# Altium PCB Ballast and Depth Controller.PcbDoc
Units mil, origin at the board's own origin, x right, y up, seen from the top; angles counter-clockwise.
Board outline 5430 x 3065 mil, 4 copper layers (Top Layer, Ground Plane, Power Plane, Bottom Layer); 103 components, 75 nets, 373 pads, 301 vias.
Unrouted connection lines stored in the file: 2.
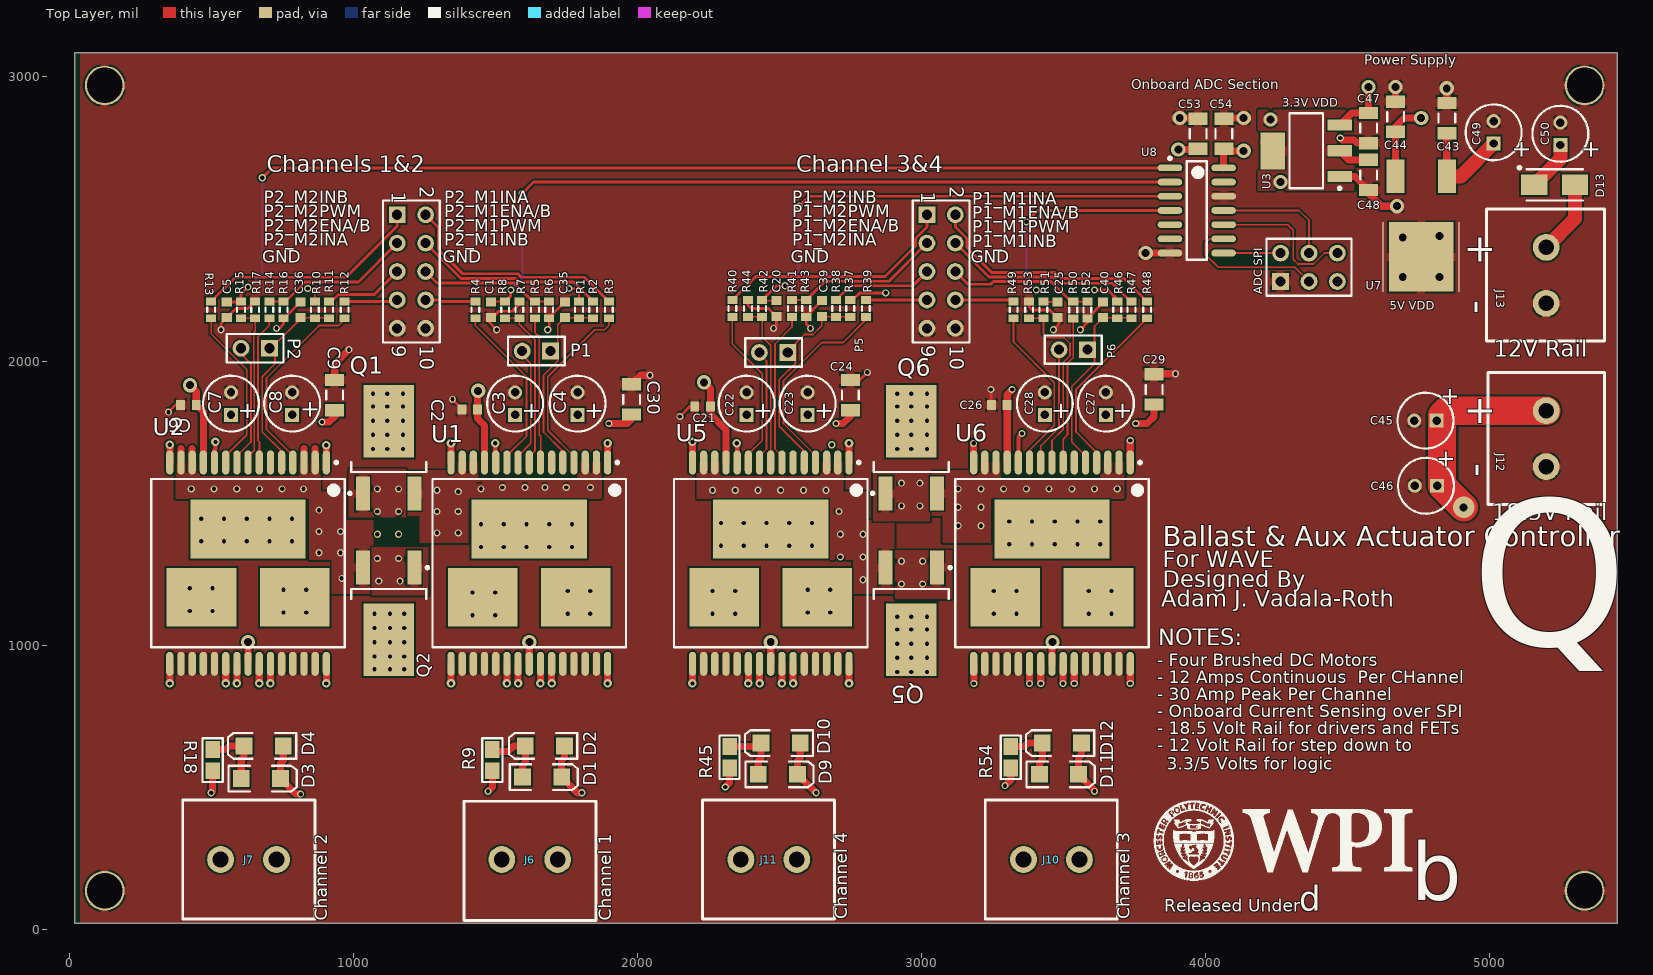
[diagram p0: Top Layer view]
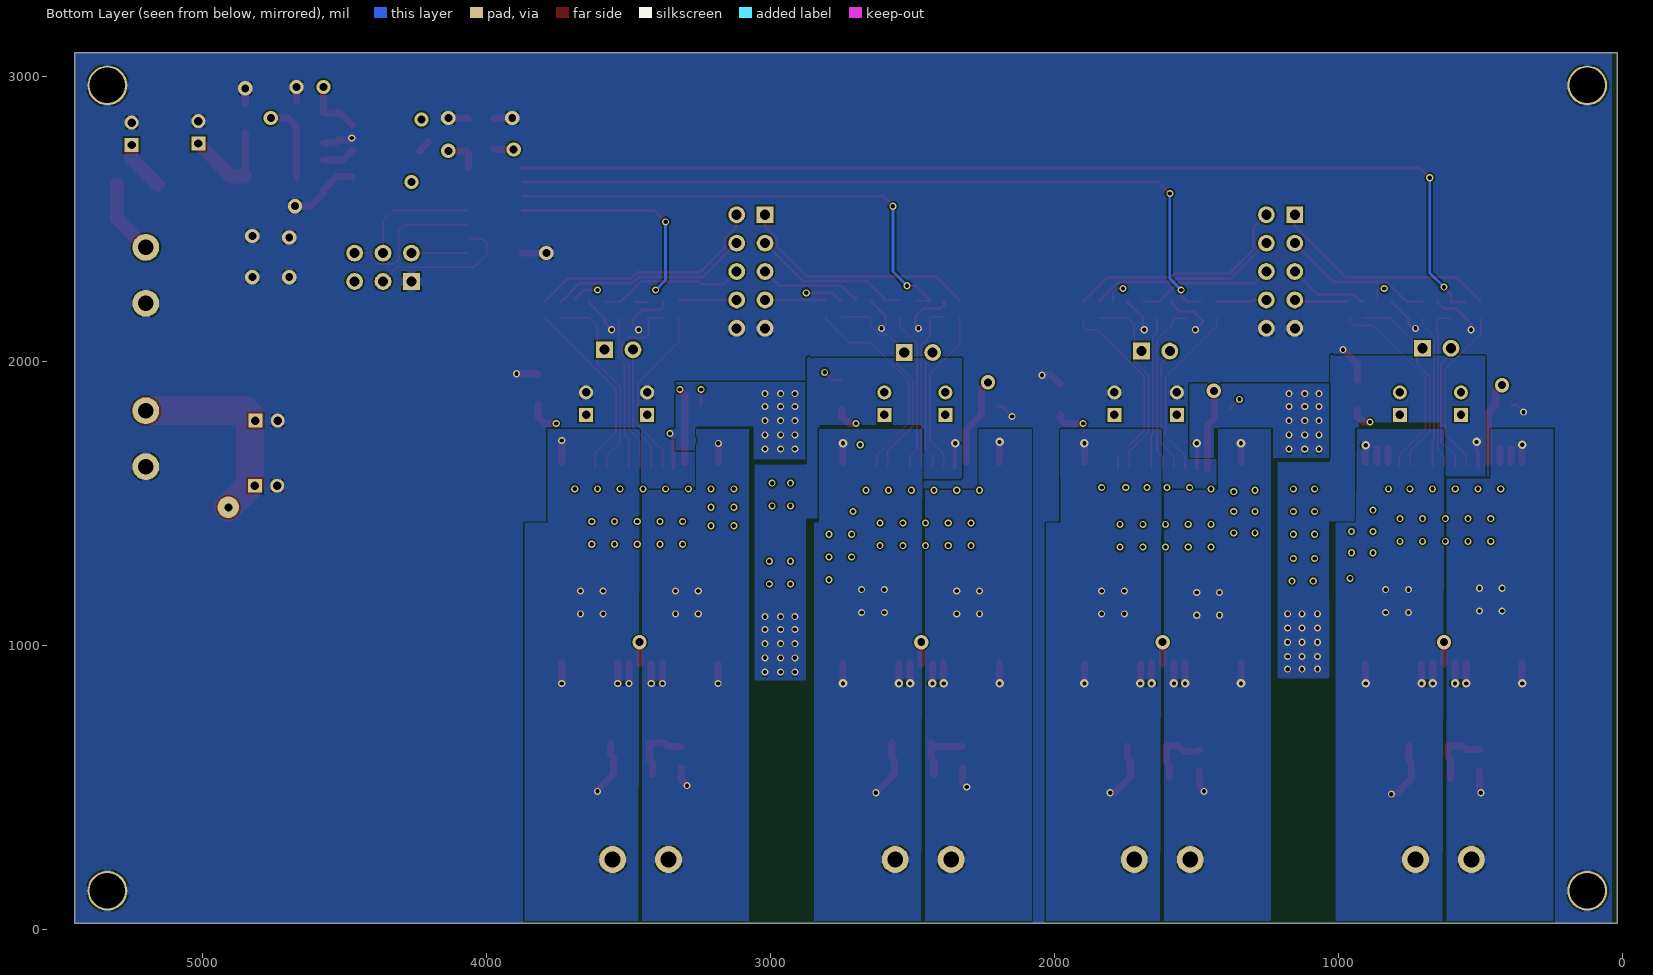
[diagram p1: Bottom Layer view, seen from below]
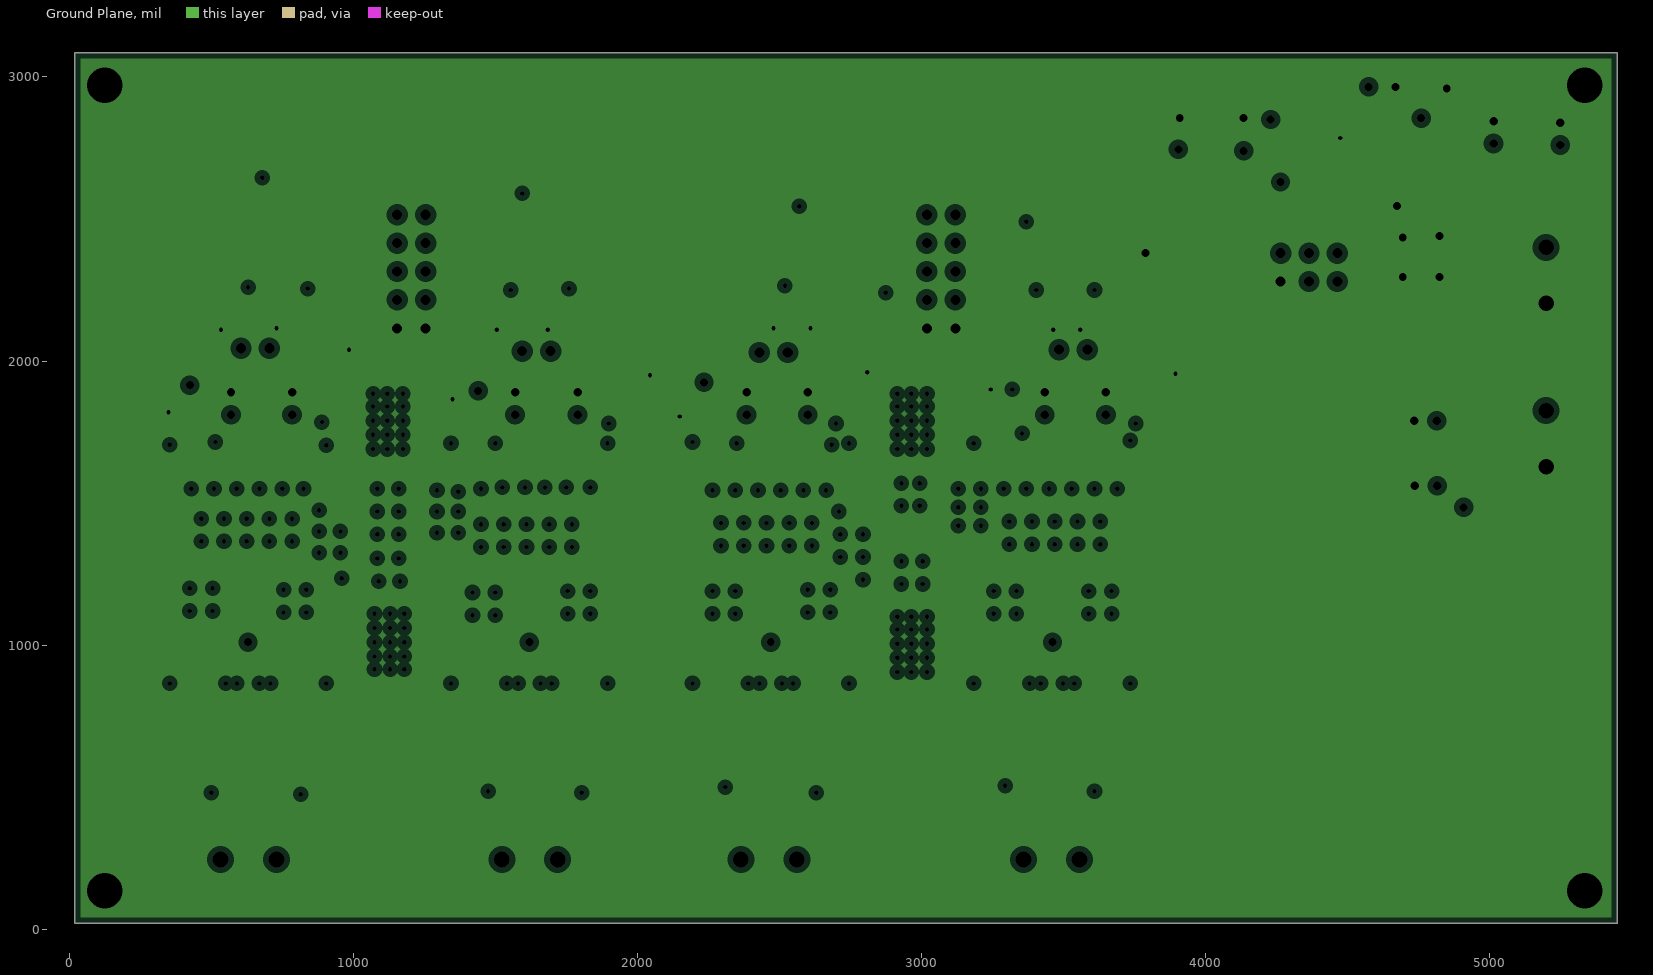
[diagram p2: Ground Plane, clearances drawn from the general rule]
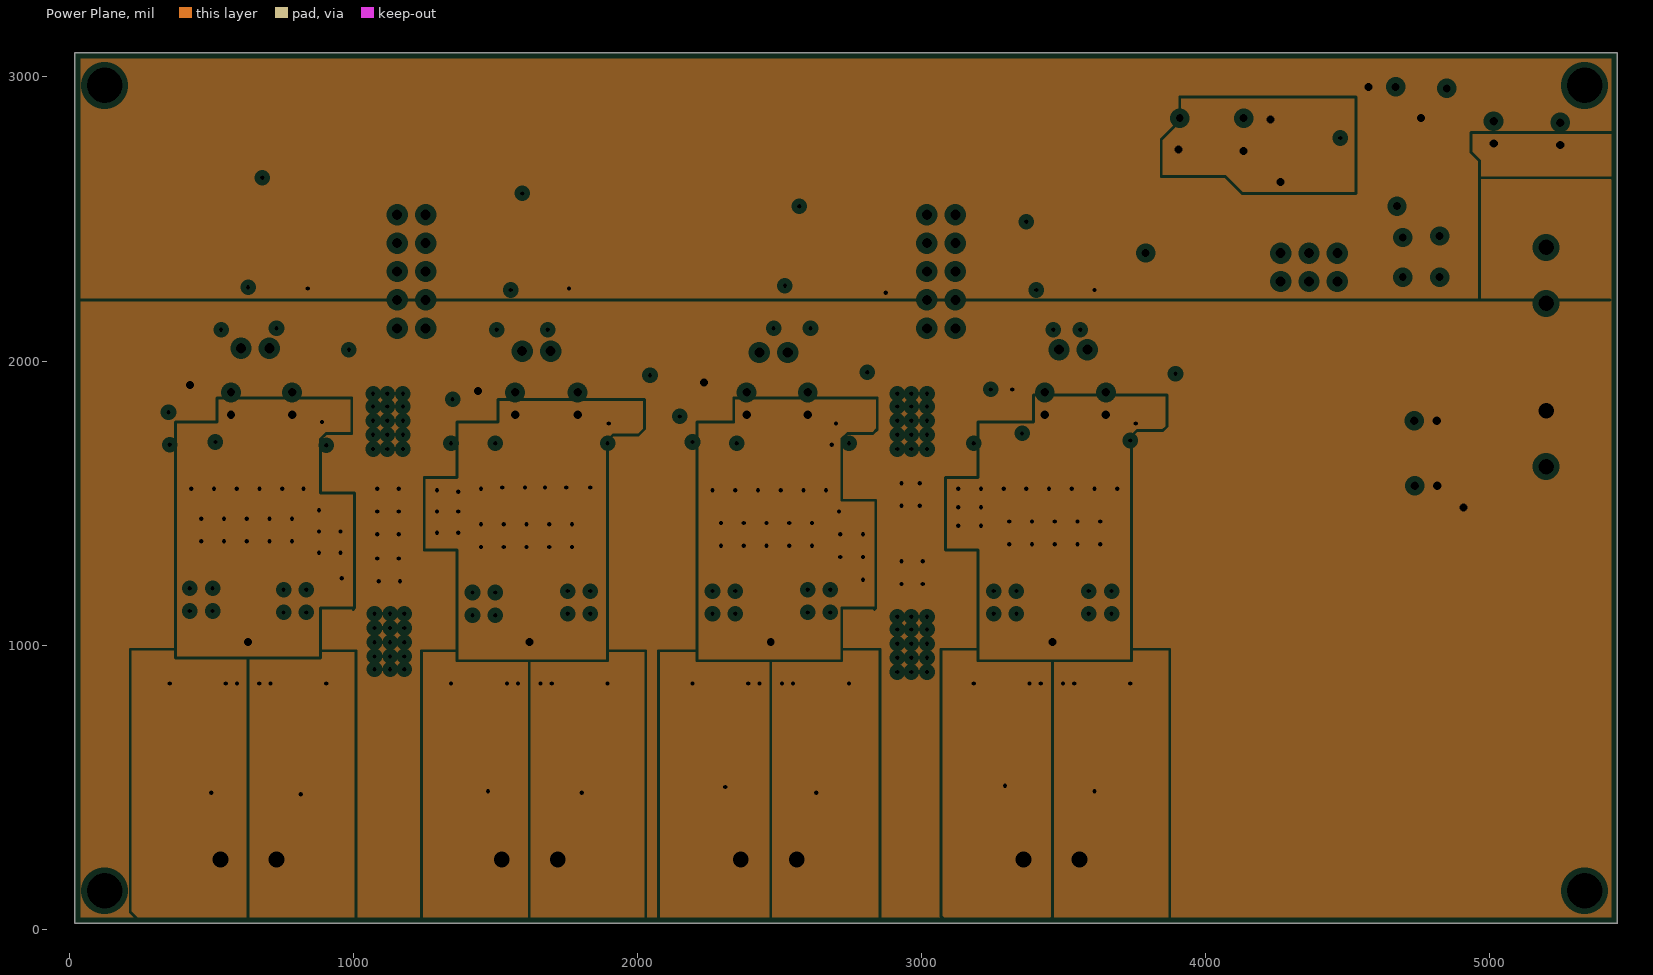
[diagram p3: Power Plane, clearances drawn from the general rule]

## Layer stack, top to bottom
Top Layer: signal copper 1.4
Dielectric: core 12.6, FR-4, Dk 4.8
Ground Plane: plane copper 1.4, net GND
Dielectric: prepreg 12.6, FR-4, Dk 4.8
Power Plane: plane copper 1.4, net (Multiple Nets)
Dielectric: core 12.6, FR-4, Dk 4.8
Bottom Layer: signal copper 1.4

## Board outline
5450,20.07 5450,3085 20,3085 20,20 5449.93,20 5450,20.07

## Design rules (kind name [scope] priority, off if disabled: settings)
Clearance [All] p1: gap=6
HoleSize [All] p1: absolutevalues=TRUE maxlimit=100 minlimit=15 maxpercent=80.000 minpercent=20.000
HoleToHoleClearance [All] p1: gap=6 allowstackedmicrovias=TRUE
PlaneClearance [All] p1: clearance=20
PlaneConnect [All] p1: planeconnectstyle=Relief reliefexpansion=10 reliefentries=4 reliefconductorwidth=10 reliefairgap=5
PolygonConnect [All] p1: connectstyle=Relief reliefconductorwidth=30 reliefentries=4 polygonreliefangle="90 Angle"
RoutingVias [All] p1: holewidth=28 width=50 viastyle="Through Hole" minholewidth=15 minwidth=25 maxholewidth=28 maxwidth=50
SilkscreenOverComponentPads [All] p1: minsilkscreentomaskgap=10
SolderMaskExpansion [All] p1: expansion=4
Width [All] p1: maxlimit=100 minlimit=6 preferedwidth=6
23 further rules are at their usual default settings.

## Classes and differential pairs
component class "Bridge Pair 3": C20 C21 C22 C23 C24 C25 C26 C27 C28 C29 C39 C40 D9 D10 D11 D12 P5 P6 Q5 Q6 R37 R38 R39 R40 R41 R42 R43 R44 R45 R46 R47 R48 R49 R50 R51 R52 R53 R54 U5 U6
component class "Pump and Power IO": C43 C44 C45 C46 C47 C48 C49 C50 D13 J6 J7 J10 J11 J12 J13 U3 U7
component class "Bridge Pair 1": C1 C2 C3 C4 C5 C6 C7 C8 C9 C30 C35 C36 D1 D2 D3 D4 P1 P2 Q1 Q2 R1 R2 R3 R4 R5 R6 R7 R8 R9 R10 R11 R12 R13 R14 R15 R16 R17 R18 U1 U2
component class "Ballast to AHD Breakout": "ADC SPI" C53 C54 "Channel 3&4" "Channels 1&2" U8

## Components (designator, comment, footprint, x,y, rotation, side; value= is the part's Value field where it differs from the comment)
"ADC SPI" "Header 3X2" HDR2X3 4265,2280 r0 top
C1 "Cap Semi" 1608[0603] 1485,2180 r90 top
C2 "Cap Semi" 1608[0603] 1410,1830 r0 top
C3 "Cap Pol2" CAPPR2-5x6.8 1570,1850 r90 top
C4 "Cap Pol2" CAPPR2-5x6.8 1790,1850 r90 top
C5 "Cap Semi" 1608[0603] 555,2180 r90 top
C6 "Cap Semi" 1608[0603] 420,1845 r0 top
C7 "Cap Pol2" CAPPR2-5x6.8 570,1850 r90 top
C8 "Cap Pol2" CAPPR2-5x6.8 785,1850 r90 top
C9 "Cap Semi" C1206 935,1880 r270 top
C20 "Cap Semi" 1608[0603] 2490,2185 r90 top
C21 "Cap Semi" 1608[0603] 2230,1840 r0 top
C22 "Cap Pol2" CAPPR2-5x6.8 2385,1850 r90 top
C23 "Cap Pol2" CAPPR2-5x6.8 2600,1850 r90 top
C24 "Cap Semi" C1206 2750,1880 r270 top
C25 "Cap Semi" 1608[0603] 3480,2180 r90 top
C26 "Cap Semi" 1608[0603] 3275,1845 r0 top
C27 "Cap Pol2" CAPPR2-5x6.8 3650,1850 r90 top
C28 "Cap Pol2" CAPPR2-5x6.8 3435,1850 r90 top
C29 "Cap Semi" C1206 3820,1900 r270 top
C30 "Cap Semi" C1206 1980,1865 r270 top
C35 "Cap Semi" 1608[0603] 1745,2180 r270 top
C36 "Cap Semi" 1608[0603] 815,2180 r270 top
C39 "Cap Semi" 1608[0603] 2650,2185 r270 top
C40 "Cap Semi" 1608[0603] 3640,2180 r270 top
C43 "Cap Semi" C1206 4850,2855 r270 top
C44 "Cap Semi" C1206 4670,2860 r270 top
C45 "Cap Pol2" CAPPR2-5x6.8 4775,1790 r180 top
C46 "Cap Pol2" CAPPR2-5x6.8 4776.88,1560.85 r180 top
C47 "Cap Semi" C1206 4575,2820 r90 top
C48 "Cap Semi" C1206 4575,2655 r90 top
C49 "Cap Pol2" CAPPR2-5x6.8 5015,2805 r90 top
C50 "Cap Pol2" CAPPR2-5x6.8 5250,2800 r90 top
C53 "Cap Semi" C1206 3975,2800 r90 top
C54 "Cap Semi" C1206 4065,2800 r90 top
"Channel 3&4" "Header 5X2" HDR2X5 3020,2515 r270 top (schematic designator P10)
"Channels 1&2" "Header 5X2" HDR2X5 1155,2515 r270 top (schematic designator P8)
D1 "LED2" 3.2X1.6X1.1 1665,535 r0 top
D2 "LED2" 3.2X1.6X1.1 1675,645 r180 top
D3 "LED2" 3.2X1.6X1.1 675,530 r0 top
D4 "LED2" 3.2X1.6X1.1 685,645 r180 top
D9 "LED2" 3.2X1.6X1.1 2495,545 r0 top
D10 "LED2" 3.2X1.6X1.1 2505,655 r180 top
D11 "LED2" 3.2X1.6X1.1 3485,545 r0 top
D12 "LED2" 3.2X1.6X1.1 3495,655 r180 top
D13 "PMEG4050EP" PMEG4050EP 5230,2620 r0 top
J6 "282856-2" 282856-2 1720,245 r180 top
J7 "282856-2" 282856-2 730,245 r180 top
J10 "282856-2" 282856-2 3360,245 r0 top
J11 "282856-2" 282856-2 2365,245 r0 top
J12 "282856-2" 282856-2 5200,1825 r270 top
J13 "282856-2" 282856-2 5200,2400 r270 top
P1 "Header 2" HDR1X2 1695,2035 r180 top
P2 "Header 2" HDR1X2 705,2045 r180 top
P5 "Header 2" HDR1X2 2530,2030 r180 top
P6 "Header 2" HDR1X2 3585,2040 r180 top
Q1 "IRFR3707ZPBF" IRFR3707ZPBF 1125,1693.34 r90 top
Q2 "IRFR3707ZPBF" IRFR3707ZPBF 1125,1113.34 r270 top
Q5 "IRFR3707ZPBF" IRFR3707ZPBF 2965,1113.34 r270 top
Q6 "IRFR3707ZPBF" IRFR3707ZPBF 2965,1693.34 r90 top
R1 "Res3" RESC1608L 1795,2180 r90 top
R2 "Res3" RESC1608L 1845,2180 r270 top
R3 "Res3" RESC1608L 1900,2180 r270 top
R4 "Res3" RESC1608L 1430,2180 r270 top
R5 "Res3" RESC1608L 1640,2180 r270 top
R6 "Res3" RESC1608L 1690,2180 r90 top
R7 "Res3" RESC1608L 1585,2180 r270 top
R8 "Res3" RESC1608L 1535,2180 r270 top
R9 "Res3" "0805 SMD Resistor" 1490,595 r90 top
R10 "Res3" RESC1608L 865,2180 r90 top
R11 "Res3" RESC1608L 915,2180 r270 top
R12 "Res3" RESC1608L 970,2180 r270 top
R13 "Res3" RESC1608L 500,2180 r270 top
R14 "Res3" RESC1608L 705,2180 r270 top
R15 "Res3" RESC1608L 605,2180 r270 top
R16 "Res3" RESC1608L 755,2180 r90 top
R17 "Res3" RESC1608L 655,2180 r270 top
R18 "Res3" "0805 SMD Resistor" 505,595 r90 top
R37 "Res3" RESC1608L 2750,2185 r90 top
R38 "Res3" RESC1608L 2700,2185 r270 top
R39 "Res3" RESC1608L 2805,2185 r270 top
R40 "Res3" RESC1608L 2335,2185 r270 top
R41 "Res3" RESC1608L 2545,2185 r270 top
R42 "Res3" RESC1608L 2440,2185 r270 top
R43 "Res3" RESC1608L 2595,2185 r90 top
R44 "Res3" RESC1608L 2390,2185 r270 top
R45 "Res3" "0805 SMD Resistor" 2325,605 r90 top
R46 "Res3" RESC1608L 3690,2180 r90 top
R47 "Res3" RESC1608L 3740,2180 r270 top
R48 "Res3" RESC1608L 3795,2180 r270 top
R49 "Res3" RESC1608L 3325,2180 r270 top
R50 "Res3" RESC1608L 3535,2179.53 r270 top
R51 "Res3" RESC1608L 3430,2180 r270 top
R52 "Res3" RESC1608L 3585,2179.53 r90 top
R53 "Res3" RESC1608L 3380,2180 r270 top
R54 "Res3" "0805 SMD Resistor" 3315,605 r90 top
U1 "VNH5019A-E" VNH5019A-E 1620,1288.34 r270 top
U2 "VNH5019A-E" VNH5019A-E 630,1288.34 r270 top
U3 "NX1117CE33Z" NX1117CE33Z 4355,2740 r180 top
U5 "VNH5019A-E" VNH5019A-E 2470,1288.34 r270 top
U6 "VNH5019A-E" VNH5019A-E 3460,1288.34 r270 top
U7 "5V Reg" DPAK-3 4760,2650 r180 top
U8 "MCP3204" MCP3204 3970,2530 r0 top

## Footprints (in the part's own frame and the unit in brackets; to place one, negate y for a bottom-side part, rotate by r counter-clockwise, add the part's x,y. Pads: shape width x height; smd on the part's side, far side on the other; paste and mask are expansions set on the pad)
3.2X1.6X1.1 [mm] "SMT LED; 2 Flat Leads"
  rect 1.5x1.5 smd: 1(-1.75,0) 2(1.75,0)
  silkscreen extent -2.9,-1.15 3.2,1.15
"0805 SMD Resistor" [mm]
  rect 1.5x1.3 smd: 1(-0.95,0) 2(0.95,0)
  silkscreen extent -1.95,-0.9 1.95,0.9
1608[0603] [mm] "Chip Capacitor, Body 1.6x0.8mm, IPC High Density"
  rect 0.8x0.9 smd: 1(-0.7,0) 2(0.7,0)
  body extent -0.87,-0.48 0.87,0.48, height 1.3
282856-2 [mm] "Screw Terminal  two pole"
  round 2.4 hole 1.4: 1(0,0) 2(5,0)
C1206 [mm] "Chip Capacitor, Body 3.2x1.6mm, IPC High Density"
  rect 1.1x1.7 smd: 1(-1.35,0) 2(1.35,0)
  silkscreen extent -0.4,-0.75 0.4,0.75, body extent -1.7,-0.9 1.7,0.9, height 1.3
CAPPR2-5x6.8 [mm] "Capacitor, Electrolytic, Radial; Body 5 x 6.8 mm (Dia.xH typ); Pin Spacing 2 mm (typ)"
  rect 1.25x1.25 hole 0.75: 1(-1,0)
  round 1.25 hole 0.75: 2(1,0)
  silkscreen extent -2.5,-2.5 2.5,2.5
DPAK-3 [mm] "Case 369C-01 for MC78xx regulators"
  rect 1.6x3 smd: 1(-2.3,0) 3(2.3,0)
  rect 5.8x6.2 smd: 2(0,7.2)
  silkscreen extent -3.4,4.1 3.4,10.3, body extent -3.4,4.1 3.4,10.3, height 2.38
HDR1X2 [mm] "Connector; Header; 2 Position"
  rect 1.5x1.5 hole 0.9: 1(0,0)
  round 1.5 hole 0.9: 2(2.54,0)
  silkscreen extent -1.27,-1.27 3.81,1.27
HDR2X3 [mm] "Connector; Header; 3x2 Position"
  rect 1.5x1.5 hole 0.9: 1(0,0)
  round 1.5 hole 0.9: 2(0,2.54) 3(2.54,0) 4(2.54,2.54) 5(5.08,0) 6(5.08,2.54)
  silkscreen extent -1.27,-1.27 6.35,3.81
HDR2X5 [mm] "Connector; Header; 5x2 Position"
  rect 1.5x1.5 hole 0.9: 1(0,0)
  round 1.5 hole 0.9: 2(0,2.54) 3(2.54,0) 4(2.54,2.54) 5(5.08,0) 6(5.08,2.54) 7(7.62,0) 8(7.62,2.54) 9(10.16,0) 10(10.16,2.54)
  silkscreen extent -1.27,-1.27 11.43,3.81
IRFR3707ZPBF [mm] "Power FET"
  rect 3.05x1.25 smd: 1(-4.05,2.29) 3(-4.05,-2.29)
  rect 6.5x4.5 smd: 4(2.4,0)
  silkscreen extent -4.17,-3.35 -1.25,3.59, body extent -2.5,-3.37 3.72,3.37, height 2.39
MCP3204 [mm] "SOIC, 14-Leads, Body 8.8x4.0mm (max), Pitch 1.27mm, IPC Medium Density"
  oval 2.2x0.6 smd: 1(-2.4,3.81) 2(-2.4,2.54) 3(-2.4,1.27) 4(-2.4,0) 5(-2.4,-1.27) 6(-2.4,-2.54) 7(-2.4,-3.81) 8(2.4,-3.81) 9(2.4,-2.54) 10(2.4,-1.27) 11(2.4,0) 12(2.4,1.27) 13(2.4,2.54) 14(2.4,3.81)
  silkscreen extent -2.52,-4.4 0.9,4.78, body extent -1.99,-4.41 1.99,4.41, height 1.75
NX1117CE33Z [mm] "3.3v linear regulator"
  rect 2.2x1 smd: 1(-3,2.3) 2(-3,0) 3(-3,-2.3)
  rect 2.2x3.3 smd: 4(3,0)
  silkscreen extent -3.13,-3.35 1.5,3.47, body extent -1.85,-3.35 1.85,3.35, height 1.8
PMEG4050EP [mm] "PMEG4050EP NXP SMD Schottky Diode"
  rect 2.35x1.85 smd: 1(1.825,0) 2(-1.825,0)
  silkscreen extent -3.27,-1.4 2.5,1.67, body extent -2.5,-1.35 2.5,1.35, height 1.1
RESC1608L [mm] "Chip Resistor, Body 1.6x0.8mm, IPC High Density"
  rect 0.7x0.9 smd: 1(-0.75,0) 2(0.75,0)
  silkscreen extent -0.2,-0.35 0.2,0.35, body extent -0.85,-0.48 0.85,0.48, height 0.6
VNH5019A-E [mm] "STMicroelectronics VNH5019A-E H-Bridge"
  oval 2.15x0.65 smd: 1(-9,7) 2(-9,6) 3(-9,5) 4(-9,4) 5(-9,3) 6(-9,2) 7(-9,1) 8(-9,0) 9(-9,-1) 10(-9,-2) 11(-9,-3) 12(-9,-4) 13(-9,-5) 14(-9,-6) 15(-9,-7) 16(9,-7) 17(9,-6) 18(9,-5) 19(9,-4) 20(9,-3) 21(9,-2) 22(9,-1) 23(9,0) 24(9,1) 25(9,2) 26(9,3) 27(9,4) 28(9,5) 29(9,6) 30(9,7)
  rect 5.25x10.3 smd: 34(-3.05,0)
  rect 5.25x6.23 smd: 35(3.05,4.165) 36(3.05,-4.165)
  silkscreen extent -9.12,-8.65 7.52,8.65, body extent -8.05,-8.65 8.05,8.65, height 2.35

## Part data
"ADC SPI": "Header, 3-Pin, Dual row"
C1 C2 C5 C6 C9 C20 C21 C24 C25 C26 C29 C30 C35 C36 C39 C40 C43 C44 C47 C48 C53 C54: "Capacitor (Semiconductor SIM Model)"
C3 C4 C7 C8 C22 C23 C27 C28 C45 C46 C49 C50: "Polarized Capacitor (Axial)"
"Channel 3&4" "Channels 1&2": "Header, 5-Pin, Dual row"
D1 D2 D3 D4 D9 D10 D11 D12: "Typical RED, GREEN, YELLOW, AMBER GaAs LED"
D13: library part Diode, "Default Diode"
J6 J7 J10 J11 J12 J13: "Two pole screw terminal"
P1 P2 P5 P6: "Header, 2-Pin"
Q1 Q2 Q5 Q6: "Power FET"
R1 R2 R3 R4 R5 R6 R7 R8 R9 R10 R11 R12 R13 R14 R15 R16 R17 R18 R37 R38 R39 R40 R41 R42 R43 R44 R45 R46 R47 R48 R49 R50 R51 R52 R53 R54: "Resistor"
U1 U2 U5 U6: "VNH5019A-E H-Bridge"
U3: "3.3v Linear Regulator"
U7: library part "VOLT REG", "Voltage regulator"
U8: "MCP3204 ADC"

## Free pads (board coordinates)
  round 140 hole 125: ""(125,135) ""(125,2970) ""(5335,135) ""(5335,2970)

## Via types
v1: diameter 25, hole 15, Top Layer to Bottom Layer, 250 vias
v2: diameter 30, hole 15, Top Layer to Bottom Layer, 27 vias
v3: diameter 50, hole 28, Top Layer to Bottom Layer, 23 vias
v4: diameter 75, hole 28, Top Layer to Bottom Layer, 1 vias

## Nets (pads, with @x,y where several pads share a name; then routed paths per layer and width w, separated by ;. In a path a pad name is that pad's centre, name@x,y a point inside that pad or via, vN(x,y) a via of type N, cw(c..) or ccw(c..) an arc to the next point about the centre after c; other vN are vias at no path point)
CS: "ADC SPI.2" U8.8 | length 200.5
  Top Layer w6: U8.8 4265,2380
GND: "ADC SPI.1" "Channel 3&4.9" "Channel 3&4.10" "Channels 1&2.9" "Channels 1&2.10" C1.1 C2.1 C3.2 C4.2 C5.1 C6.1 C7.2 C8.2 C9.1 C20.1 C21.1 C22.2 C23.2 C24.1 C25.1 C26.1 C27.2 C28.2 C29.1 C30.1 C35.1 C36.1 C39.1 C40.1 C43.1 C44.1 C45.2 C46.2 C47.1 C48.1 C49.2 C50.2 C53.2 C54.2 J12.2 J13.2 pad. R6.1 R7.1 R16.1 R17.1 R43.1 R44.1 R52.1 R53.1 U1.17 U1.18 U1.19 U1.20 U1.26 U1.27 U1.28 U1.29 U2.17 U2.18 U2.19 U2.20 U2.26 U2.27 U2.28 U2.29 U3.1 U5.17 U5.18 U5.19 U5.20 U5.26 U5.27 U5.28 U5.29 U6.17 U6.18 U6.19 U6.20 U6.26 U6.27 U6.28 U6.29 U7.2 U8.7 U8.12 | length 2508.5
  Top Layer w6: v1(3560,2110) v1@3570,2110
  Top Layer w10: v1(350,1820) 375,1845 C6.1 ; v1(535,2110) 535,2132.44 C5.1 587.31,2184.75 630.22,2184.75 R17.1 ; v1(730,2115) 740,2115 755,2130 755,2147.56 C36.1 ; v1(1350,1865) 1382.44,1832.56 C2.1 ; v1(1505,2110) 1480,2135 1480,2142.52 1512.73,2175.25 1560.25,2175.25 1585,2200 R7.1 ; v1(1685,2110) 1690,2115 R6.1 1690,2152.56 C35.1 ; v1(2150,1805) 2185,1840 C21.1 ; R44.1 2390,2195 2400,2185 2462.44,2185 C20.1 2490,2125 v1(2480,2115) ; R43.1 2595,2130 v1(2610,2115) ; R43.1@2595,2157.56 C39.1 ; C24.1 2783.15,1933.15 v1(2810,1960) ; v1(3245,1900) 3245,1847.44 C26.1 ; R53.1 3380,2190 3390,2180 3452.44,2180 C25.1 3485,2147.44 3485,2130 v1(3465,2110) ; v1(3560,2110) 3585,2135 R52.1 3640,2205 C40.1
  Top Layer w25: C9.1 935,1990 v1(985,2040) ; C30.1 2011.85,1950 v1(2045,1950) ; v3(3790,2380) U8.7 ; C29.1 3821.85,1955 v1(3895,1955) ; v3(3910,2855) 3973.15,2855 C53.2 ; C54.2 4066.85,2855 v3(4135,2855) ; U3.1 4527.4,2649.45 C48.1 4575,2590 4620,2545 v3(4675,2545) ; v1(4475,2785) 4481.81,2778.19 4524.08,2778.19 4535.41,2766.85 C47.1 ; C44.1 v3(4670,2965) ; C43.1 v3(4850,2960)
  other v3: 4695,2295 4825,2295 4695,2435 4825,2440
MISO: "ADC SPI.6" U8.10 | length 533.6
  Top Layer w6: U8.10 4290,2480 4310,2460 4310,2357.94 4326.47,2341.47 4380.96,2341.47 4419.49,2380 4465,2380
MOSI: "ADC SPI.3" U8.9 | length 515.1
  Top Layer w6: U8.9 4015,2430 4000,2415 4000,2375 4045,2330 4315,2330 4365,2280
NetC3_1: C3.1 C4.1 C30.2 Q1.3 U1.2 U1.3 U1.13 U1.14 U1.23 U1.34 | length 179.1
  Top Layer w25: U1.23 v3(1620,1010) ; v1(1900,1780) 1965,1780 1980,1795 C30.2
  other v1: 1450,1345 1530,1345 1610,1345 1690,1345 1770,1345 1295,1395 1370,1395 1450,1425 1530,1425 1610,1425 1690,1425 1770,1425 1295,1470 1370,1470 1370,1540 1295,1545 1450,1550 1525,1555 1605,1555 1675,1555 1750,1555 1835,1555
NetC7_1: C7.1 C8.1 C9.2 Q2.3 U2.2 U2.3 U2.13 U2.14 U2.23 U2.34 | length 345.9
  Top Layer w25: U2.14 393.78,1691.36 ; U2.13 433.15,1691.36 ; U2.23 v3(630,1010) ; U2.3 826.85,1691.36 ; U2.2 866.22,1691.36 ; v1(890,1785) 915,1785 935,1805 C9.2
  other v1: 960,1235 880,1325 955,1325 465,1365 545,1365 625,1365 705,1365 785,1365 880,1400 955,1400 465,1445 545,1445 625,1445 705,1445 785,1445 880,1475 430,1550 510,1550 590,1550 670,1550 750,1550 825,1550
NetC22_1: C22.1 C23.1 C24.2 Q5.3 U5.2 U5.3 U5.13 U5.14 U5.23 U5.34 | length 158.2
  Top Layer w25: U5.23 v3(2470,1010) ; v1(2700,1780) 2725,1780 2750,1805 C24.2
  other v1: 2795,1230 2715,1310 2795,1310 2295,1350 2375,1350 2455,1350 2535,1350 2615,1350 2715,1390 2795,1390 2295,1430 2375,1430 2455,1430 2535,1430 2615,1430 2710,1470 2265,1545 2345,1545 2425,1545 2505,1545 2585,1545 2665,1545 2685,1705
NetC27_1: C27.1 C28.1 C29.2 Q6.3 U6.2 U6.3 U6.13 U6.14 U6.23 U6.34 | length 191.3
  Top Layer w25: U6.23 v3@3460,1008.15 ; v1(3755,1780) 3795,1780 3820,1805 C29.2
  other v1: 3310,1355 3390,1355 3470,1355 3550,1355 3630,1355 3130,1420 3210,1420 3310,1435 3390,1435 3470,1435 3550,1435 3630,1435 3130,1485 3210,1485 3130,1550 3210,1550 3290,1550 3370,1550 3450,1550 3530,1550 3610,1550 3690,1550
  other v3: 3461.85,1010
NetC39_2: C39.2 P5.1 R37.1 R38.2 U5.5 | length 790.4
  Top Layer w6: P5.1@2530,2015 P5.1 P5.1@2530,2055 ; U5.5@2588.11,1624.33 2588.03,1624.41 2588.03,1681.97 2500,1770 2500,1935 2557.5,1992.5 2557.5,2062.5 2588.5,2093.5 2618.91,2093.5 2650,2124.59 C39.2 2651.97,2155.47 R37.1
NetC40_2: C40.2 P6.1 R46.1 R47.2 U6.5 | length 694.4
  Top Layer w6: U6.5@3578.11,1624.33 3578.11,1666.89 3530,1715 3530,1910 3610,1990 3610,2122.44 C40.2 3738.03,2152.44 R47.2
NetD1_1: D1.1 D2.2 R9.2 | length 241.6
  Top Layer w25: R9.2 1497.4,625 1545,625 1565,645 D2.2 1606.1,586.1 1596.1,576.1 D1.1
NetD3_1: D3.1 D4.2 R18.2 | length 235.5
  Top Layer w25: R18.2 552.4,632.4 565,645 D4.2 616.1,606.1 606.1,596.1 D3.1
NetD9_1: D9.1 D10.2 R45.2 | length 230.5
  Top Layer w25: R45.2 2423.5,642.4 D10.2 2436.1,601.1 2426.1,591.1 D9.1
NetD11_1: D11.1 D12.2 R54.2 | length 230.5
  Top Layer w25: R54.2 3362.4,642.4 3375,655 D12.2 3426.1,596.1 3416.1,586.1 D11.1
NetD13_1: D13.1 J13.1 | length 262.2
  Top Layer w50: J13.1 5301.85,2501.85 D13.1
NetP1_2: P1.2 U1.9 | length 446.5
  Top Layer w6: U1.9@1580.63,1619.33 1580.63,1665.63 1625,1710 1625,1990 1595,2020 P1.2
NetP2_2: P2.2 U2.9 | length 450.6
  Top Layer w6: U2.9@590.63,1629.33 590.63,1665.63 640,1715 640,1990 605,2025 P2.2
NetP5_2: P5.2 U5.9 | length 426.2
  Top Layer w6: P5.2 2430,2025 2455,2000 2455,1690 2430.63,1665.63 U5.9@2430.63,1624.33
NetP6_2: P6.2 U6.9 | length 447.3
  Top Layer w6: U6.9@3420.63,1624.33 3420.63,1700.63 3485,1765 P6.2@3485,2045
NetQ1_4: Q1.4 U1.11 | length 91.5
  Top Layer w6: U1.11@1500,1621.22 U1.11@1501.89,1619.33
  Top Layer w15: U1.11@1500,1621.22 v2(1500,1710)
  other v1: 1070,1690 1120,1690 1175,1690 1070,1740 1120,1740 1175,1740 1070,1790 1120,1790 1175,1790 1070,1840 1120,1840 1175,1840 1070,1885 1120,1885 1175,1885
NetQ2_4: Q2.4 U2.11 | length 85.9
  Top Layer w15: U2.11@510,1631.22 510,1685 515,1690 v2(515,1715)
  other v1: 1075,915 1130,915 1180,915 1075,960 1130,960 1180,960 1075,1010 1130,1010 1180,1010 1075,1060 1130,1060 1180,1060 1075,1110 1130,1110 1180,1110
NetQ5_4: Q5.4 U5.11 | length 83.8
  Top Layer w15: U5.11@2351.89,1624.33 v2@2351.89,1708.11
  other v1: 2915,905 2965,905 3020,905 2915,955 2965,955 3020,955 2915,1005 2965,1005 3020,1005 2915,1055 2965,1055 3020,1055 2915,1100 2965,1100 3020,1100
  other v2: 2350,1710
NetQ6_4: Q6.4 U6.11 | length 126.1
  Top Layer w15: U6.11@3341.89,1624.33 3341.89,1731.89 v1(3355,1745)
  other v1: 2915,1690 2965,1690 3020,1690 2915,1740 2965,1740 3020,1740 2915,1790 2965,1790 3020,1790 2915,1840 2965,1840 3020,1840 2915,1885 2965,1885 3020,1885
NetR3_2: R3.2 U1.4 | length 679
  Top Layer w6: U1.4@1777.48,1619.33 1777.48,1663.65 1685,1756.13 1685,1945 1850,2110 1885,2110 1900,2125 R3.2
NetR4_2: R4.2 U1.10 | length 634.2
  Top Layer w6: R4.2 1430,2125 1610,1945 1610,1735 1541.26,1666.26 U1.10@1541.26,1619.33
NetR5_2: R5.2 U1.7 | length 539.7
  Top Layer w6: R5.2 1640,2100 1655,2085 1655,1740 1660,1735 1660,1619.96 U1.7@1659.37,1619.33
NetR7_2: R7.2 R8.2 U1.8 | length 612.2
  Top Layer w6: R8.2 R7.2 1585,2130 1640,2075 1640,1683.65 1620,1663.65 U1.8@1620,1619.33
NetR12_2: R12.2 U2.4 | length 730.2
  Top Layer w6: U2.4@787.48,1629.33 787.48,1667.52 695,1760 695,1940 880,2125 949.06,2125 965,2140.94 955.47,2150.47 R12.2
NetR13_2: R13.2 U2.10 | length 603.5
  Top Layer w6: R13.2 500,2095 625,1970 625,1740 551.26,1666.26 U2.10@551.26,1629.33
NetR14_2: R14.2 U2.7 | length 540
  Top Layer w6: U2.7@669.37,1629.33 670,1629.96 670,1715 665,1720 665,2085 705,2125 R14.2
NetR15_2: R15.2 R17.2 U2.8 | length 583.2
  Top Layer w6: R15.2 R17.2 655,2105 650,2100 650,1996.97 652,1994.97 652,1685.65 630,1663.65 U2.8@630,1629.33
NetR39_2: R39.2 U5.4 | length 746.8
  Top Layer w6: U5.4@2627.48,1624.33 2627.48,1667.52 2515,1780 2515,1930 2650,2065 2725,2065 2805,2145 R39.2@2805,2160.47
NetR40_2: R40.2 U5.10 | length 594.8
  Top Layer w6: R40.2 2335,2060 2440,1955 2440,1720 2391.26,1671.26 U5.10@2391.26,1624.33
NetR41_2: R41.2 U5.7 | length 566.1
  Top Layer w6: U5.7@2509.37,1624.33 2509.37,1665.63 2485,1690 2485,2060 2545,2120 R41.2
NetR42_2: R42.2 R44.2 U5.8 | length 593.6
  Top Layer w6: R44.2 R42.2 2440,2085 2470,2055 U5.8@2470,1624.33
NetR48_2: R48.2 U6.4 | length 659.7
  Top Layer w6: U6.4@3617.48,1624.33 3617.48,1677.52 3545,1750 3545,1900.47 R48.2
NetR49_2: R49.2 U6.10 | length 621.8
  Top Layer w6: R49.2 3325,2066.9 3468.61,1923.29 3468.61,1773.61 3381.26,1686.26 U6.10@3381.26,1624.33
NetR50_2: R50.2 U6.7 | length 540.9
  Top Layer w6: U6.7@3499.37,1624.33 3499.37,1724.37 3515,1740 3515,1991.97 3535.53,2012.5 3535.53,2149.47 R50.2
NetR51_2: R51.2 R53.2 U6.8 | length 676.3
  Top Layer w6: R53.2 R51.2 3430,2095 3442.5,2082.5 3502.5,2082.5 3523.53,2061.47 3523.53,2018.53 3500,1995 3500,1760 3460,1720 U6.8@3460,1624.33
P1_M1_CURRENT_SENSE: C1.2 R8.1 U8.2 | length 2752.2
  Top Layer w6: C1.2 1486.97,2209.53 R8.1
  Top Layer w10: R8.1 1555,2229.53 v1(1555,2250) ; v1(1595,2590) 1635,2630 U8.2@3874.53,2630
  Bottom Layer w10: v1(1555,2250) 1595,2290 v1(1595,2590)
P1_M1ENA/B: "Channels 1&2.4" R2.1 | length 675.3
  Top Layer w10: 1255,2415 1379,2291 1573.21,2291 1585.71,2278.5 1776.3,2278.5 1845,2209.8 R2.1
P1_M1INA: "Channels 1&2.2" R3.1 | length 816.9
  Top Layer w10: 1255,2515 1300,2470 1300,2392.63 1385.63,2307 1579.83,2307 1591.83,2295 1814.53,2295 R3.1
P1_M1INB: "Channels 1&2.8" R4.1 | length 177.3
  Top Layer w10: 1255,2215 1305,2215 1310.47,2209.53 R4.1
P1_M1OUTA: D1.2 D2.1 J6.1 U1.1 U1.24 U1.25 U1.30 U1.35 | length 482.4
  Top Layer w25: v2(1659.37,865) U1.24 ; v2(1698.74,865) U1.25 ; D2.1 1743.9,603.9 1733.9,593.9 D1.2 1788.9,480 v1(1805,480) ; v2(1895.59,865) U1.30 ; U1.1 v2(1895.59,1710)
  other v1: 1755,1110 1835,1110 1755,1190 1835,1190
P1_M1OUTB: J6.2 R9.1 U1.15 U1.16 U1.21 U1.22 U1.36 | length 353.2
  Top Layer w25: v2(1344.41,865) U1.16 ; U1.15 v2(1344.41,1710) ; v1(1475,485) 1490,500 R9.1 ; v2(1541.26,865) U1.21 ; v2(1580.63,865) U1.22
  other v1: 1420,1105 1500,1105 1420,1185 1500,1185
P1_M1PWM: "Channels 1&2.6" R5.1 R6.2 | length 478.7
  Top Layer w6: R5.1 R6.2
  Top Layer w10: 1255,2315 1295,2275 1566.58,2275 1632.05,2209.53 R5.1
P1_M2_CURRENT_SENSE: C5.2 R15.1 U8.1 | length 3726.4
  Top Layer w10: C5.2 603.03,2207.56 R15.1 605,2235 v1(630,2260) ; v1(680,2645) 715,2680 U8.1@3874.53,2680
  Bottom Layer w10: v1(630,2260) 680,2310 v1(680,2645)
P1_M2CS: 
P1_M2ENA/B: "Channels 1&2.5" R11.1 | length 283.7
  Top Layer w10: R11.1 922.95,2209.53 947.73,2234.31 1074.31,2234.31 1155,2315
P1_M2INA: "Channels 1&2.7" R12.1 | length 187.3
  Top Layer w10: R12.1 1149.53,2209.53 1155,2215
P1_M2INB: "Channels 1&2.1" R13.1 | length 805
  Top Layer w10: R13.1 585.47,2295 975,2295 1155,2475 1155,2515
P1_M2OUTA: D3.2 D4.1 J7.1 U2.1 U2.24 U2.25 U2.30 U2.35 | length 480.7
  Top Layer w25: v2(669.37,865) U2.24 ; v2(708.74,865) U2.25 ; D4.1 753.9,593.9 743.9,583.9 D3.2 798.9,475 v1(815,475) ; v2(905.59,865) U2.30 ; U2.1 v2(905.59,1703.34)
  other v1: 755,1115 835,1115 755,1195 835,1195
P1_M2OUTB: J7.2 R18.1 U2.15 U2.16 U2.21 U2.22 U2.36 | length 349
  Top Layer w25: v2(354.41,865) U2.16 ; U2.15 v2(354.41,1705) ; v1(500,480) 505,485 R18.1 ; v2(551.26,865) U2.21 ; v2(590.63,865) U2.22
  other v1: 425,1120 505,1120 425,1200 505,1200
P1_M2PWM: "Channels 1&2.3" R14.1 R16.2 | length 535.1
  Top Layer w6: R14.1 R16.2
  Top Layer w10: R16.2 761.29,2209.53 830.27,2278.5 1018.5,2278.5 1155,2415
P3_M1_CURRENT_SENSE: C20.2 R42.1 U8.3 | length 1771.5
  Top Layer w6: R42.1 2441.97,2212.56 C20.2
  Top Layer w10: R42.1 2490.47,2265 v1(2520,2265) ; v1(2570,2545) 2605,2580 U8.3@3874.53,2580
  Bottom Layer w10: v1(2520,2265) 2570,2315 v1(2570,2545)
P3_M1ENA/B: "Channel 3&4.5" R38.1 | length 370.3
  Top Layer w10: R38.1@2700,2223.23 R38.1 2750.47,2265 2970,2265 3020,2315
P3_M1INA: "Channel 3&4.7" R39.1 | length 215.2
  Top Layer w10: R39.1 2805.47,2215 3020,2215
P3_M1INB: "Channel 3&4.1" R40.1 | length 850.5
  Top Layer w10: R40.1 2417.47,2297 2872,2297 2979.47,2404.47 2979.47,2431.79 3020,2472.31 3020,2515
P3_M1OUTA: D9.2 D10.1 J11.2 U5.1 U5.24 U5.25 U5.30 U5.35 | length 481.5
  Top Layer w25: v2(2509.37,865) U5.24 ; v2(2548.74,865) U5.25 ; D10.1 2573.9,603.9 2563.9,593.9 D9.2 2628.9,480 v1(2630,480) ; v2(2745.59,865) U5.30 ; U5.1 v2(2745.59,1710)
  other v1: 2600,1115 2680,1115 2600,1195 2680,1195
P3_M1OUTB: J11.1 R45.1 U5.15 U5.16 U5.21 U5.22 U5.36 | length 353.2
  Top Layer w25: v2(2194.41,865) U5.16 ; U5.15 v2(2194.41,1715) ; v1(2310,500) 2325,515 R45.1 ; v2(2391.26,865) U5.21 ; v2(2430.63,865) U5.22
  other v1: 2265,1110 2345,1110 2265,1190 2345,1190
P3_M1PWM: "Channel 3&4.3" R41.1 R43.2 | length 566
  Top Layer w6: R41.1 R43.2
  Top Layer w10: R43.2@2602.95,2214.53 R43.2 2661.47,2281 2886,2281 3020,2415
P3_M2_CURRENT_SENSE: C25.2 R51.1 U8.4 | length 823.6
  Top Layer w6: R51.1@3431.97,2207.56 C25.2
  Top Layer w10: v1(3370,2490) 3410,2530 U8.4@3874.53,2530
  Bottom Layer w10: v1(3370,2490) 3370,2285 v1(3405,2250)
P3_M2ENA/B: "Channel 3&4.4" R47.1 | length 705.1
  Top Layer w10: 3120,2415 3239,2296 3463.21,2296 3485.71,2273.5 3673.08,2273.5 3737.05,2209.53 R47.1
P3_M2INA: "Channel 3&4.2" R48.1 | length 845.5
  Top Layer w10: 3120,2515 3120,2472.31 3160.53,2431.79 3160.53,2399.47 3248,2312 3469.83,2312 3491.83,2290 3714.53,2290 R48.1
P3_M2INB: "Channel 3&4.8" R49.1 | length 207.3
  Top Layer w10: 3120,2215 3319.53,2215 R49.1
P3_M2OUTA: D11.2 D12.1 J10.2 U6.1 U6.24 U6.25 U6.30 U6.35 | length 481.7
  Top Layer w25: v1(3499.37,865) U6.24 ; v1(3538.74,865) U6.25 ; D12.1 3563.9,613.9 3553.9,603.9 D11.2 3610,488.9 v1(3610,485) ; v1(3735.59,865) U6.30 ; U6.1 v1(3735.59,1720)
  other v1: 3590,1110 3670,1110 3590,1190 3670,1190
P3_M2OUTB: J10.1 R54.1 U6.15 U6.16 U6.21 U6.22 U6.36 | length 344.6
  Top Layer w25: U6.15 v1(3184.41,1710) ; v1(3185,865) U6.16@3185,933.42 ; v1(3295,505) 3315,525 R54.1 ; v1(3381.26,865) U6.21 ; v1(3420.63,865) U6.22
  other v1: 3255,1110 3335,1110 3255,1190 3335,1190
P3_M2PWM: "Channel 3&4.6" R50.1 R52.2 | length 517.2
  Top Layer w6: R50.1 R52.2
  Top Layer w10: 3120,2315 3165,2270 3244.75,2270 3254.75,2280 3456.58,2280 3527.52,2209.06 R50.1
SCK: "ADC SPI.4" U8.11 | length 430
  Top Layer w6: U8.11 4330,2530 4365,2495 4365,2380
U1_ENA_DIAGA: C35.2 P1.1 R1.1 R2.2 U1.5 | length 690.4
  Top Layer w6: U1.5@1738.11,1619.33 1738.11,1681.89 1670,1750 1670,1950 1720,2000 1720,2127.44 C35.2 R2.2@1843.03,2152.44
U2_ENA_DIAGA: C36.2 P2.1 R10.1 R11.2 U2.5 | length 731.5
  Top Layer w6: P2.1@705,2020 P2.1 ; U2.5@748.11,1629.33 748.11,1681.89 680,1750 680,1945 725,1990 725,2058.5 815,2148.5 C36.2 ; C36.2@816.97,2150.47 818.5,2152 913.47,2152 R11.2
VCC_IN: C2.2 C6.2 C21.2 C26.2 C45.1 C46.1 J12.1 Q1.1 Q2.1 Q5.1 Q6.1 U1.12 U2.12 U5.12 U6.12 | length 1887.4
  Top Layer w25: v3(425,1915) 447.56,1892.44 C6.2 472.52,1820.04 U2.12 ; v3(1440,1895) 1437.56,1892.56 C2.2 1437.56,1797.48 1462.52,1772.52 U1.12 U1.12@1462.52,1619.33 ; v3(2235,1925) 2257.56,1902.44 C21.2 2257.56,1812.44 2312.52,1757.48 U5.12 ; U6.12 3302.56,1642.71 C26.2 3302.56,1882.56 v1(3320,1900)
  Top Layer w100: v4(4909.61,1484.61) 4833.36,1560.85 4833.36,1809.15 4849.21,1825 J12.1
  other v1: 2930,1215 3005,1215 1090,1225 1165,1225 2930,1295 3005,1295 1085,1305 1160,1305 1085,1390 1160,1390 1085,1470 1160,1470 2930,1490 2995,1490 1085,1550 1160,1550 2930,1570 2995,1570
VDD: C44.2 C47.2 R1.2 R10.2 R37.2 R46.2 U3.3 U7.3 | length 857.4
  Top Layer w6: v1(840,2255) 860,2255 865,2250 R10.2 ; v1(1760,2255) 1780,2255 1795,2240 R1.2
  Top Layer w10: R37.2 2757.95,2214.53 2783.42,2240 v1(2875,2240) ; v1(3610,2250) 3657.19,2250 R46.2@3690,2217.19 ; U7.3 U7.3@4670,2650.55
  Top Layer w25: U3.3 4515.71,2873.15 C47.2 v3(4575,2965) ; U7.3@4670,2650.55 C44.2 4670,2825 4700,2855 v3(4760,2855)
VDD_3.3: C48.2 C53.1 C54.1 U3.2 U3.4 U8.13 U8.14 | length 359
  Top Layer w25: v3(3905,2745) 3973.15,2745 C53.1 ; U8.14 4064.49,2732.64 4071.85,2740 v3(4135,2740) ; U3.4@4205.04,2771.85 U3.4 ; U3.2@4475,2740 U3.2 4504.96,2708.15 C48.2
  other v3: 4265,2630 4230,2850
VDD_12V: C43.2 C49.1 C50.1 D13.2 U7.1 | length 543.1
  Top Layer w25: C43.2 4850,2650.55 U7.1
  Top Layer w50: U7.1 4899.37,2650 C49.1 ; D13.2 5250,2711.85 C50.1
pads on no net: "ADC SPI.5" U1.6 U2.6 U5.6 U6.6 U8.5 U8.6

## Polygon pours and split planes (outlines as drawn)
GND on Bottom Layer "Power Plane-No Net" (solid, remove dead copper, pour order 37): 40,20 5450,20 5450,3085 40,3085 40,20
P1_M1OUTB on Bottom Layer "Power Plane-No Net" (solid, remove dead copper, pour order 25): 1615,30 1240,30 1240,1760 1425,1760 1425,1545 1615,1545
P3_M2OUTB on Bottom Layer "Power Plane-No Net" (solid, remove dead copper, pour order 24): 3451.85,30 3076.85,30 3076.85,1760 3261.85,1760 3261.85,1545 3451.85,1545
P3_M1OUTB on Bottom Layer "Power Plane-No Net" (solid, remove dead copper, pour order 27): 2456.85,30 2081.85,30 2081.85,1760 2266.85,1760 2266.85,1545 2456.85,1545
NetQ5_4 on Bottom Layer "Power Plane-No Net" (solid, pour order 46): 3056.86,875.56 2876.86,875.56 2876.86,1440.56 2871.86,1445.56 2830,1445 2830,1775 2820,1775 2466.86,1775.56 2466.86,1585.56 2331.86,1585.56 2326.86,1590.56 2326.86,2010.56 2861.86,2010.56 2866.86,2015.56 2871.86,2010.56 2871.86,1640.56 2876.86,1635.56 3056.86,1635.56
P3_M1OUTA on Bottom Layer "Power Plane-No Net" (solid, remove dead copper, pour order 31): 2466.85,1760 2471.85,30 2846.85,30 2846.85,1430 2830,1430 2830,1760
P1_M2OUTB on Bottom Layer "Power Plane-No Net" (solid, remove dead copper, pour order 26): 620,30 245,30 245,1760 465,1760 465,1585 620,1585
P1_M2OUTA on Bottom Layer "Power Plane-No Net" (solid, remove dead copper, pour order 30): 630,1760 635,30 1010,30 1010,1430 940,1430 940,1760
NetQ2_4 on Bottom Layer "Power Plane-No Net" (solid, pour order 45): 1214.29,883.34 1034.29,883.34 1035,1435 930,1435 930,1785 645,1785 645,1595 485,1595 484.29,1598.34 484.29,2018.34 1019.29,2018.34 1024.29,2023.34 1029.29,2018.34 1029.29,1648.34 1034.29,1643.34 1214.29,1643.34
NetQ1_4 on Bottom Layer "Power Plane-No Net" (solid, pour order 44): 1035,1920 1035,1660 1230,1660 1230,1765 1440,1765 1440,1660 1525,1660 1525,1920
P1_M1OUTA on Bottom Layer "Power Plane-No Net" (solid, remove dead copper, pour order 29): 1625,1760 1630,30 2030,30 2030,1430 1979.17,1430 1980,1760
P3_M2OUTA on Bottom Layer "Power Plane-No Net" (solid, remove dead copper, pour order 28): 3461.85,1760 3466.85,30 3866.85,30 3866.85,1430 3785,1430 3785,1760
NetQ6_4 on Bottom Layer "Power Plane-No Net" (solid, pour order 43): 2875,1925 2875,1655 3060,1655 3060,1770 3260,1770 3260,1685 3335,1685 3335,1925
GND on Top Layer "Power Plane-No Net" (solid, remove dead copper, pour order 34): 5450,20.07 5450,96.19 5450,3085 5372.2,3085 40,3085 40,1517.02 40,15 45.19,20.07 5450,20.07
VCC_IN on Top Layer "Power Plane-No Net" (solid, remove dead copper, pour order 36): 1265,1345 1065,1345 1065,1175 1265,1175 1265,1345
VCC_IN on Top Layer "Power Plane-No Net" (solid, remove dead copper, pour order 33): 2830.19,1435 3030.19,1435 3030.19,1605 2830.19,1605 2830.19,1435
VCC_IN on Top Layer "Power Plane-No Net" (solid, remove dead copper, pour order 35): 3108.34,1333.34 2908.34,1333.34 2908.34,1163.34 3108.34,1163.34 3108.34,1333.34
VCC_IN on Top Layer "Power Plane-No Net" (solid, remove dead copper, pour order 38): 985,1450 1185,1450 1185,1620 985,1620 985,1450
NetC3_1 on Top Layer "Power Plane-No Net" (solid, remove dead copper, pour order 40): 1260.15,1615 1255.15,1610 1180.15,1610 1180.15,1455 1235.15,1455 1235.15,1360 1405.15,1360 1405.15,1515 1440.15,1515 1875.43,1514.62 1875,1665 1790,1665 1790.43,1584.62 1440.43,1584.62 1440.43,1654.62 1440,1665 1360,1665 1360.15,1615
NetC7_1 on Top Layer "Power Plane-No Net" (solid, remove dead copper, pour order 42): 1070,1180 925,1180 925,1300 845,1300 845,1515 375,1515 375,1670 460,1670 460,1595 810,1595 810,1675 885,1675 885,1540 975,1540 975,1440 1070,1440
NetC22_1 on Top Layer "Power Plane-No Net" (solid, remove dead copper, pour order 41): 2905,1180 2760,1180 2760,1300 2680,1300 2680,1515 2210,1515 2210,1670 2295,1670 2295,1595 2645,1595 2645,1675 2725,1675 2725,1540 2810,1540 2810,1440 2905,1440
NetC27_1 on Top Layer "Power Plane-No Net" (solid, remove dead copper, pour order 39): 3100.15,1615 3095.15,1610 3020.15,1610 3020.15,1455 3075.15,1455 3075.15,1360 3245.15,1360 3245.15,1515 3280.15,1515 3715.43,1514.62 3715,1665 3630,1665 3630.43,1584.62 3280.43,1584.62 3280.43,1654.62 3280,1665 3200,1665 3200.15,1615
VDD_3.3 on Top Layer "Power Plane-No Net" (solid, remove dead copper, pour order 32): 4185,2885 4185,2600 4525,2600 4525,2885 4185,2885
GND on Ground Plane (split plane): 5429.9,40.1 40.1,40.1 40.1,3064.9 5429.9,3064.9
VDD_12V on Power Plane (split plane): 5429.9,2650.1 4970.1,2650.1 4970.1,2705 4969.71,2706.95 4968.6,2708.6 4940.1,2737.11 4940.1,2799.9 5429.9,2799.9
VDD_3.3 on Power Plane (split plane): 4524.9,2595.1 4132.11,2595.1 4073.6,2653.6 4071.95,2654.71 4070,2655.1 3850.1,2655.1 3850.1,2777.89 3913.6,2841.4 3914.71,2843.05 3915.1,2845 3915.1,2924.9 4524.9,2924.9
VDD_12V on Power Plane (split plane): 5429.9,2637.89 5429.9,2215.98 5429.71,2216.95 5428.6,2218.6 5426.95,2219.71 5425,2220.1 4970.1,2220.1 4970.1,2639.9 5427.89,2639.9
NetC27_1 on Power Plane (split plane): 3859.9,1772.11 3847.89,1760.1 3760,1760.1 3758.05,1759.71 3756.4,1758.6 3736.4,1738.6 3735.29,1736.95 3734.9,1735 3734.9,950.1 3205.1,950.1 3205.1,1335 3204.71,1336.95 3203.6,1338.6 3201.95,1339.71 3200,1340.1 3090.1,1340.1 3090.1,1584.9 3200,1584.9 3201.95,1585.29 3203.6,1586.4 3204.71,1588.05 3205.1,1590 3205.1,1779.9 3395,1779.9 3396.95,1780.29 3398.6,1781.4 3399.71,1783.05 3400.1,1785 3400.1,1874.9 3859.9,1874.9
NetC22_1 on Power Plane (split plane): 2839.9,1762.11 2827.89,1750.1 2740,1750.1 2738.05,1749.71 2736.4,1748.6 2716.4,1728.6 2715.29,1726.95 2714.9,1725 2714.9,1510 2715.29,1508.05 2716.4,1506.4 2718.05,1505.29 2720,1504.9 2834.9,1504.9 2834.9,1135.1 2720,1135.1 2718.05,1134.71 2716.4,1133.6 2715.29,1131.95 2714.9,1130 2714.9,950.1 2215.1,950.1 2215.1,1779.9 2340,1779.9 2341.95,1780.29 2343.6,1781.4 2344.71,1783.05 2345.1,1785 2345.1,1864.9 2839.9,1864.9
P3_M2OUTB on Power Plane (split plane): 3194.9,945 3195.29,943.05 3196.4,941.4 3198.05,940.29 3200,939.9 3456.75,939.9 3456.75,43.96 3456.4,43.6 3455.29,41.95 3454.92,40.1 3080.08,40.1 3079.71,41.95 3078.6,43.6 3075.1,47.11 3075.1,979.9 3194.9,979.9
P3_M2OUTA on Power Plane (split plane): 3869.9,40.1 3466.6,40.1 3466.95,41.85 3466.95,939.9 3740,939.9 3741.95,940.29 3743.6,941.4 3744.71,943.05 3745.1,945 3745.1,979.9 3869.9,979.9
P3_M1OUTA on Power Plane (split plane): 2849.9,40.1 2475.1,40.1 2475.1,939.9 2720,939.9 2721.95,940.29 2723.6,941.4 2724.71,943.05 2725.1,945 2725.1,979.9 2849.9,979.9
P3_M1OUTB on Power Plane (split plane): 2204.9,945 2205.29,943.05 2206.4,941.4 2208.05,940.29 2210,939.9 2464.9,939.9 2464.9,40.1 2080.1,40.1 2080.1,974.9 2204.9,974.9
VDD on Power Plane (split plane): 5429.9,2810.1 4935,2810.1 4933.05,2809.71 4931.4,2808.6 4930.29,2806.95 4929.9,2805 4929.9,2735 4930.29,2733.05 4931.4,2731.4 4959.9,2702.89 4959.9,2220.1 40.1,2220.1 40.1,3064.9 5429.9,3064.9
NetC3_1 on Power Plane (split plane): 2020,1762.21 2002.89,1745.1 1915,1745.1 1913.05,1744.71 1911.4,1743.6 1891.4,1723.6 1890.29,1721.95 1889.9,1720 1889.9,950.1 1370.1,950.1 1370.1,1335 1369.71,1336.95 1368.6,1338.6 1366.95,1339.71 1365,1340.1 1255.1,1340.1 1255.1,1584.9 1365,1584.9 1366.95,1585.29 1368.6,1586.4 1369.71,1588.05 1370.1,1590 1370.1,1779.9 1510,1779.9 1511.95,1780.29 1513.6,1781.4 1514.71,1783.05 1515.1,1785 1515.1,1859.9 2020,1859.9
NetC7_1 on Power Plane (split plane): 989.9,1750.1 905,1750.1 903.05,1749.71 901.4,1748.6 881.4,1728.6 880.29,1726.95 879.9,1725 879.9,1535 880.29,1533.05 881.4,1531.4 883.05,1530.29 885,1529.9 999.9,1529.9 999.9,1135.1 885,1135.1 883.05,1134.71 881.4,1133.6 880.29,1131.95 879.9,1130 879.9,960.1 380.1,960.1 380.1,1779.9 520,1779.9 521.95,1780.29 523.6,1781.4 524.71,1783.05 525.1,1785 525.1,1864.9 989.9,1864.9
P1_M1OUTB on Power Plane (split plane): 1359.9,945 1360.29,943.05 1361.4,941.4 1363.05,940.29 1365,939.9 1614.9,939.9 1614.9,40.1 1247.11,40.1 1245.1,42.11 1245.1,974.9 1359.9,974.9
VCC_IN on Power Plane (split plane): 234 vertices, not listed, extent 40.1,40.1 5429.9,2214.02
P1_M1OUTA on Power Plane (split plane): 2024.9,40.1 1625.1,40.1 1625.1,939.9 1895,939.9 1896.95,940.29 1898.6,941.4 1899.71,943.05 1900.1,945 1900.1,974.9 2024.9,974.9
P1_M2OUTB on Power Plane (split plane): 369.9,955 370.29,953.05 371.4,951.4 373.05,950.29 375,949.9 624.9,949.9 624.9,40.1 242.11,40.1 220.1,62.11 220.1,979.9 369.9,979.9
P1_M2OUTA on Power Plane (split plane): 1004.9,40.1 635.1,40.1 635.1,949.9 885,949.9 886.95,950.29 888.6,951.4 889.71,953.05 890.1,955 890.1,974.9 1004.9,974.9

## Other copper
Power Plane (plane layer: these items are gaps in the copper):
  lines w10: 25,2215 5425,2215 ; 240,35 215,60 215,985 375,985 ; 630,40 630,955 ; 855,1870 995,1870 995,1745 905,1745 885,1725 885,1535 1005,1535 1005,1130 ; 885,980 1010,980 1010,40 ; 885,1870 520,1870 520,1785 375,1785 375,955 885,955 885,1130 1005,1130 ; 1000,1125 1005,1130 ; 1245,35 1240,40 1240,980 1250,980 1365,980 ; 1620,40 1620,945 ; 1865,1865 2025.1,1865 2025.1,1760.1 2005,1740 1915,1740 1895,1720 1895,945 1365,945 1365,1335 1250.29,1335 1250,1335.29 1250,1590 1365,1590 1365,1785 1510,1785 1510,1865 1875,1865 ; 1895,980 2030,980 2030,30 ; 2075,40 2075,980 2210,980 ; 2470,40 2470,945 ; 2690,1870 2845,1870 2845,1760 2830,1745 2740,1745 2720,1725 2720,1510 2840,1510 2840,1130 ; 2720,985 2855,985 2855,40 ; 2720,1870 2340,1870 2340,1785 2210,1785 2210,945 2720,945 2720,1130 2840,1130 ; 2835,1125 2840,1130 ; 3075,40 3070,45 3070,985 3200,985 3200,990 ; 3085,1335.29 3085,1590 3200,1590 3200,1785 3395,1785 3395,1880 3710,1880 3865,1880 3865,1770 3850,1755 3760,1755 3740,1735 3740,945 3200,945 3200,1335 3085.29,1335 ; 3460,40 3461.85,41.85 3461.85,945 ; 3740,985 3865,985 3875,985 3875,40 ; 4965,2215 4965,2705 4935,2735 4935,2805 5450,2805 ; 4965,2645 5430,2645 5440,2635 ; 3845,2650 3845,2780 3910,2845 3910,2930 4530,2930 4530,2590 4130,2590 4070,2650 3845,2650

## Silkscreen, mask and mechanical layers (free items; w line width, h text height)
Top Overlay:
  drawing of 40 lines, arcs and shapes, not listed
  text "Power Supply" at 4560,3030 h60
  text "Onboard ADC Section" at 3740,2945 h60
  text "3.3V VDD" at 4270,2895 h30
  text "P2_M2INB" at 685,2539.69 h75
  text "P2_M1INA" at 1320,2540 h75
  text "P1_M2INB" at 2545,2539.69 h75
  text "P1_M1INA" at 3180,2535 h75
  text "P2_M2PWM" at 685,2490 h75
  text "P2_M1ENA/B" at 1320,2490 h75
  text "P1_M2PWM" at 2545,2490 h75
  text "P1_M1ENA/B" at 3180,2485 h75
  text "P2_M2ENA/B" at 685,2440 h75
  text "P2_M1PWM" at 1320,2440 h75
  text "P1_M2ENA/B" at 2545,2440 h75
  text "P1_M1PWM" at 3180,2435 h75
  text "P2_M2INA" at 685,2390 h75
  text "P2_M1INB" at 1320,2390 h75
  text "P1_M2INA" at 2545,2390 h75
  text "P1_M1INB" at 3180,2385 h75
  text "+" at 4910,2350 h100
  text "GND" at 680,2330 h75
  text "GND" at 1315,2330 h75
  text "GND" at 2540,2330 h75
  text "GND" at 3175,2330 h75
  text "5V VDD" at 4650,2180 h30
  text "-" at 4990,2165 h100 r90
  text "12V Rail" at 5015,1995 h100
  text "+" at 4910,1780 h100
  text "-" at 4995,1590 h100 r90
  text "18.5V Rail" at 5010,1420 h100
  text "Ballast & Aux Actuator Controller" at 3850,1325 h120
  text "For WAVE" at 3850,1255 h100
  text "Designed By" at 3850,1185 h100
  text "Adam J. Vadala-Roth" at 3845,1115 h100
  text "NOTES:" at 3835,980 h100
  text "- Four Brushed DC Motors" at 3830,910 h75
  text "- 12 Amps Continuous  Per CHannel" at 3830,850 h75
  text "Q" at 4935,810 h1000
  text "- 30 Amp Peak Per Channel" at 3830,790 h75
  text "- Onboard Current Sensing over SPI" at 3830,730 h75
  text "- 18.5 Volt Rail for drivers and FETs" at 3830,670 h75
  text "- 12 Volt Rail for step down to" at 3830,610 h75
  text "3.3/5 Volts for logic" at 3865,545 h75
  text "Released Under" at 3855,45 h75
  text "Channel 4" at 2755,35 h75 r90
  text "Channel 3" at 3750,35 h75 r90
  text "d" at 4330,35 h150
  text "b" at 4725,35 h350
  text "Channel 2" at 925,30 h75 r90
  text "Channel 1" at 1925,30 h75 r90
Mechanical 15:
  circle w5: c114.94,-1160 r0.06
  circle w5: c-5239.38,-3499.9 r0.06
  circle w5: c-5237.6,-3498 r0.06
  circle w5: c-5235.6,-3498.6 r0.06
  circle w5: c-5235.6,-3499.7 r0.06
  lines w5: -5240,-3499.88 ccw(c-5239.88,-3499.88) -5239.88,-3500 -5235.6,-3500 -5235.6,-3499.9 -5235.5,-3499.8 -5235.5,-3498.5 -5235.6,-3498.4 -5235.6,-3497.96 -5235.66,-3497.9 -5239.88,-3497.9 ccw(c-5239.88,-3498.03) -5240,-3498.03 -5240,-3499.88

## Text inside footprints (layer, text, board x,y; h text height)
C3: Top Overlay "+" at 1655,1790 h59.06 r90
C4: Top Overlay "+" at 1875,1790 h59.06 r90
C7: Top Overlay "+" at 655,1790 h59.06 r90
C8: Top Overlay "+" at 875,1795 h59.06 r90
C22: Top Overlay "+" at 2470,1790 h59.06 r90
C23: Top Overlay "+" at 2685,1790 h59.06 r90
C27: Top Overlay "+" at 3735,1790 h59.06 r90
C28: Top Overlay "+" at 3520,1790 h59.06 r90
C45: Top Overlay "+" at 4895,1900 h59.06 r180
C46: Top Overlay "+" at 4881.88,1680.85 h59.06 r180
C49: Top Overlay "+" at 5140,2710 h59.06 r90
C50: Top Overlay "+" at 5385,2710 h59.06 r90
"Channel 3&4": Top Overlay "2" at 3100,2615 h50 r270; Top Overlay "1" at 3000,2595 h50 r270; Top Overlay "9" at 3000,2055 h50 r270; Top Overlay "10" at 3100,2055 h50 r270
"Channels 1&2": Top Overlay "2" at 1235,2615 h50 r270; Top Overlay "1" at 1135,2595 h50 r270; Top Overlay "9" at 1135,2055 h50 r270; Top Overlay "10" at 1235,2055 h50 r270